# Altium PCB PCB.PcbDoc
Units mm, origin at the board's own origin, x right, y up, seen from the top; angles counter-clockwise.
Board outline 30.73 x 47.24 mm, 2 copper layers (Top Layer, Bottom Layer); 21 components, 31 nets, 97 pads, 0 vias.
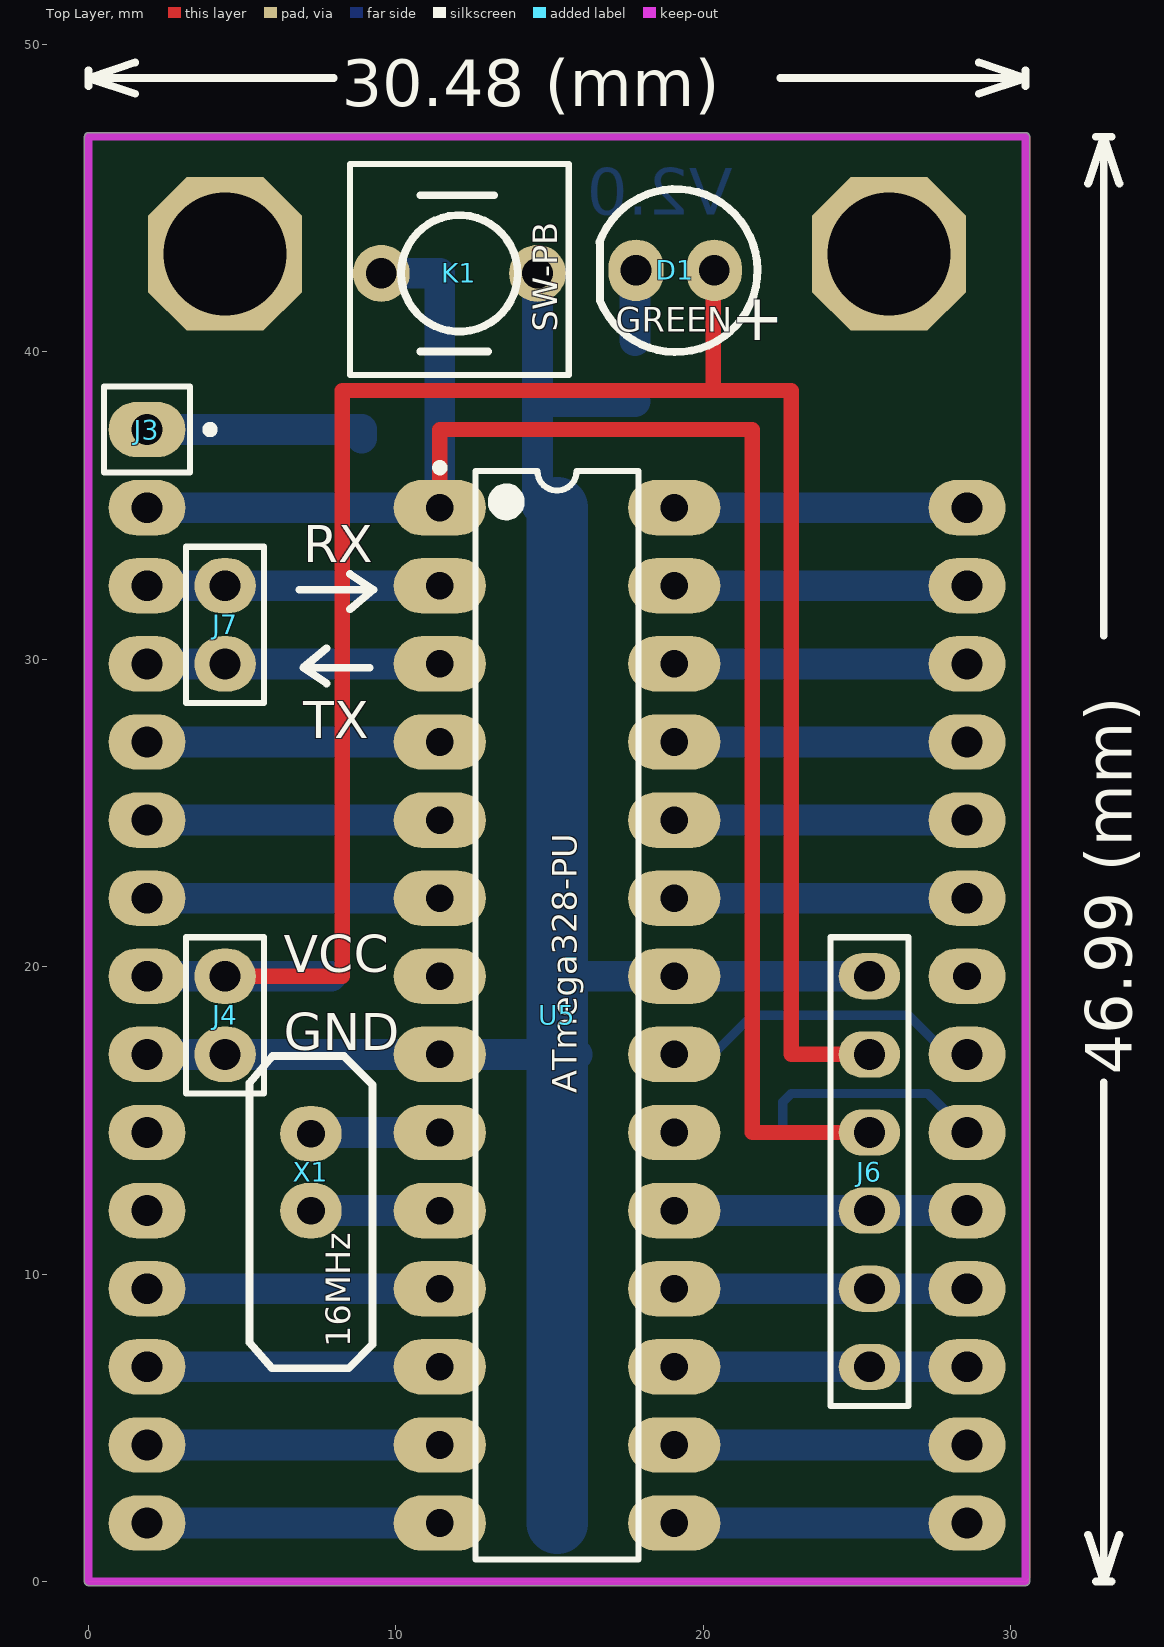
[diagram p0: Top Layer view]
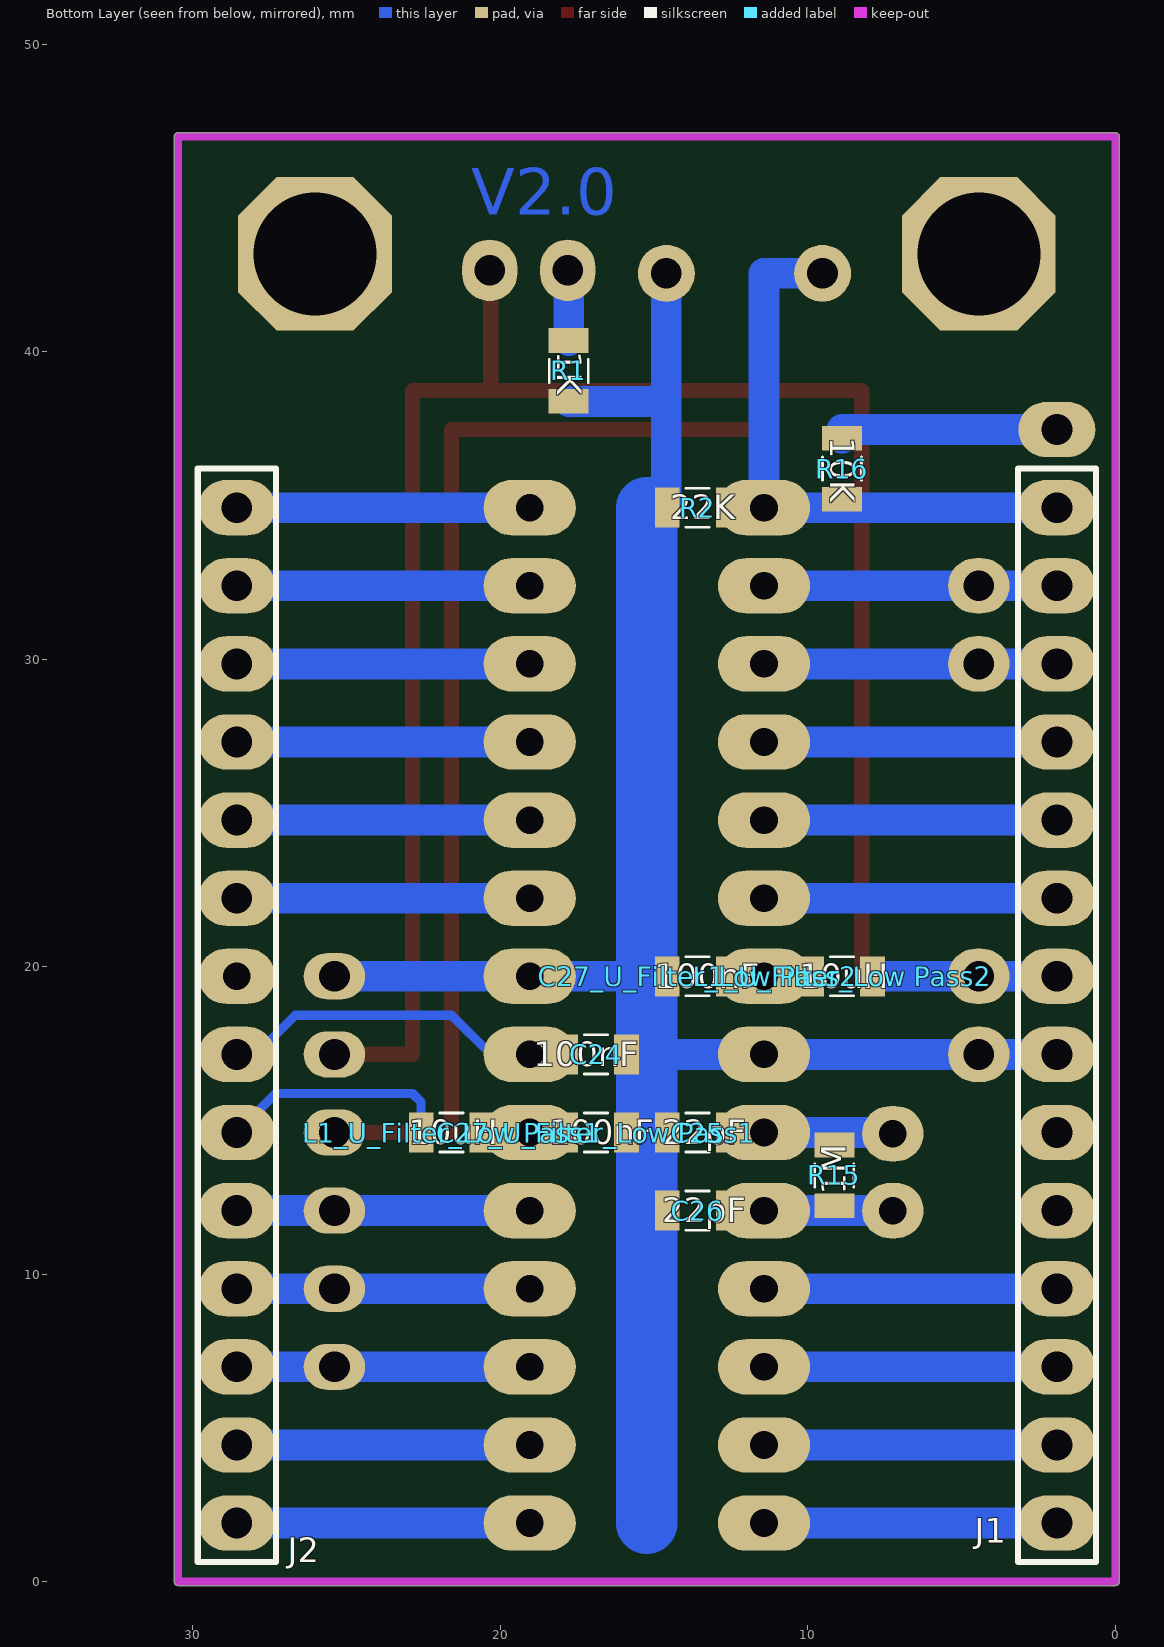
[diagram p1: Bottom Layer view, seen from below]
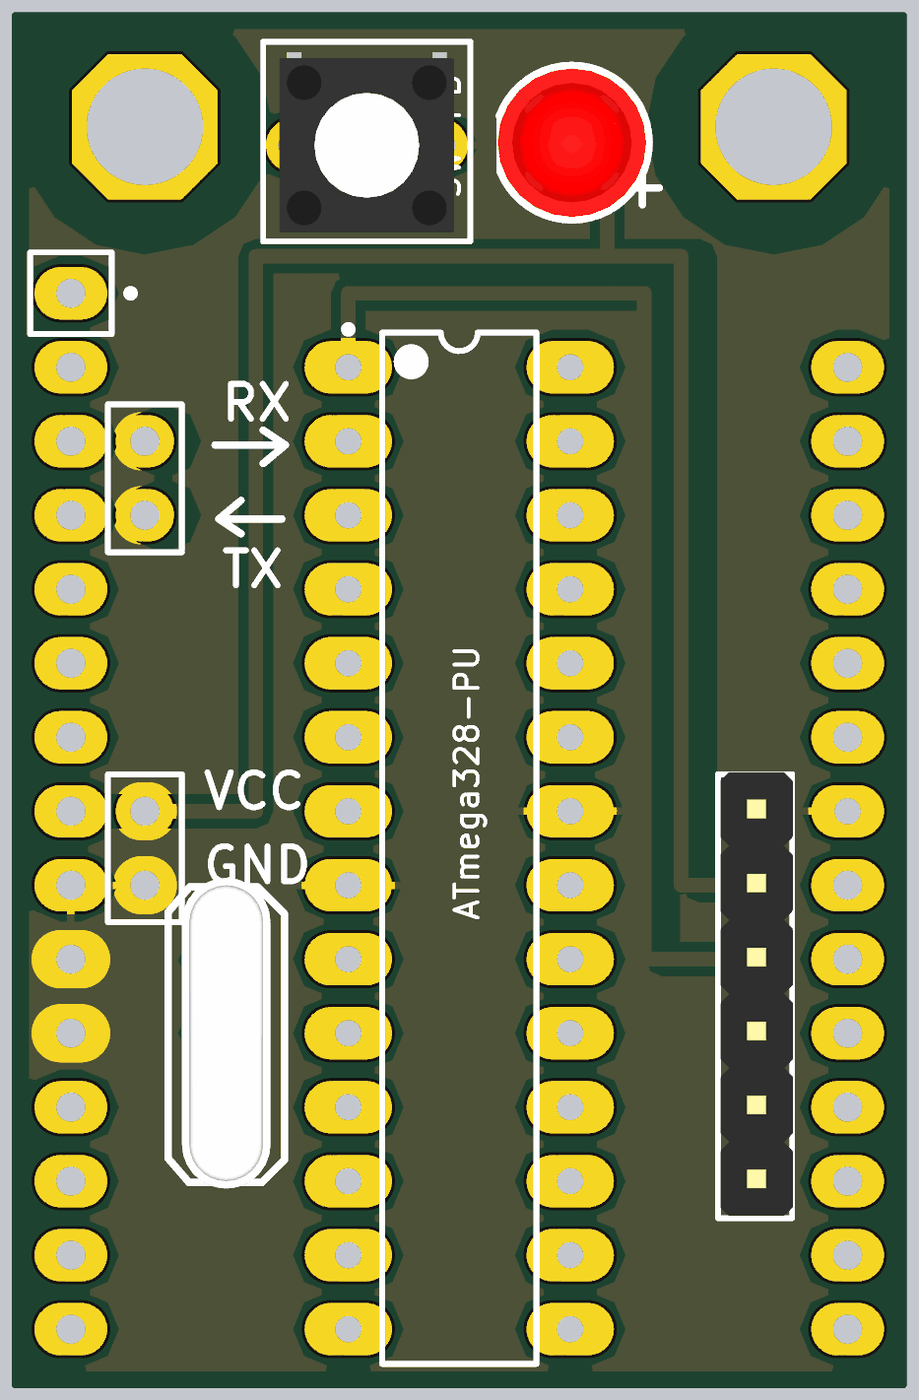
[diagram p2: 3D render of the assembled board from above, using the file's embedded part models]

## Layer stack, top to bottom
Top Solder: solder mask 0.0102, Solder Resist, Dk 3.5
Top Layer: signal copper 0.0356
Dielectric 1: dielectric 0.32, FR-4, Dk 4.8
Bottom Layer: signal copper 0.0356
Bottom Solder: solder mask 0.0102, Solder Resist, Dk 3.5

## Board outline
0,-0.127 cw(c0,0) -0.127,0 -0.127,46.99 cw(c0,46.99) 0,47.117 30.48,47.117 cw(c30.48,46.99) 30.607,46.99 30.607,0 cw(c30.48,0) 30.48,-0.127

## Design rules (kind name [scope] priority, off if disabled: settings)
Clearance [All] p1: gap=0.3
PolygonConnect [All] p1: connectstyle=Relief reliefconductorwidth=0.254 reliefentries=4 polygonreliefangle="90 Angle" airgapwidth=0.254
RoomDefinition "U_Power Supply" [InComponentClass('U_Power Supply')] p1: confinementstyle=ConfineIn formatcopy=TRUE lockcomponents=FALSE outline -25.4,-35.56 25.4,-35.56 25.4,-10.16 -25.4,-10.16
RoomDefinition Main [InComponentClass('Main')] p2: confinementstyle=ConfineIn formatcopy=TRUE lockcomponents=FALSE outline -25.4,-35.56 25.4,-35.56 25.4,-10.16 -25.4,-10.16
RoomDefinition U_MCU_ATmega328 [InComponentClass('U_MCU_ATmega328')] p3: confinementstyle=ConfineIn formatcopy=TRUE lockcomponents=FALSE outline 199.835,75.645 199.835,112.013 209.667,112.013 209.667,75.645
RoomDefinition U_Key_Reset [InComponentClass('U_Key_Reset')] p4: confinementstyle=ConfineIn formatcopy=TRUE lockcomponents=FALSE outline 193.321,112.114 206.021,112.114 206.021,123.544 193.321,123.544
RoomDefinition U_Interface_USART [InComponentClass('U_Interface_USART')] p5: confinementstyle=ConfineIn formatcopy=TRUE lockcomponents=FALSE outline 195.507,103.505 195.507,111.833 198.755,111.833 198.755,103.505
RoomDefinition "U_Filter_Low Pass2" [InComponentClass('U_Filter_Low Pass2')] p6: confinementstyle=ConfineIn formatcopy=TRUE lockcomponents=FALSE outline 185.066,93.699 198.401,93.699 198.401,98.779 185.066,98.779
RoomDefinition "U_Filter_Low Pass1" [InComponentClass('U_Filter_Low Pass1')] p7: confinementstyle=ConfineIn formatcopy=TRUE lockcomponents=FALSE outline 213.641,87.984 219.356,87.984 219.356,101.319 213.641,101.319
RoomDefinition U_Crystal [InComponentClass('U_Crystal')] p8: confinementstyle=ConfineIn formatcopy=TRUE lockcomponents=FALSE outline 186.336,78.459 199.671,78.459 199.671,93.064 186.336,93.064
RoomDefinition "U_Connectors_SPI Programer" [InComponentClass('U_Connectors_SPI Programer')] p9: confinementstyle=ConfineIn formatcopy=TRUE lockcomponents=FALSE outline 219.002,80.645 219.002,96.593 222.25,96.593 222.25,80.645
RoutingVias [All] p1: holewidth=0.711 width=1.27 viastyle="Through Hole" minholewidth=0.711 minwidth=1.27 maxholewidth=0.711 maxwidth=1.27
SolderMaskExpansion [All] p1: expansion=0.102
Width [All] p1: maxlimit=2 minlimit=0.3 preferedwidth=0.5
30 further rules are at their usual default settings.

## Classes and differential pairs
channel class "Filter_Low Pass": "U_Filter_Low Pass1" "U_Filter_Low Pass2"
component class U_MCU_ATmega328: C24 J1 J2 U5
component class U_Key_Reset: K1 R2 R16
component class "U_Filter_Low Pass2": "C27_U_Filter_Low Pass2" "L1_U_Filter_Low Pass2"
component class "U_Filter_Low Pass1": "C27_U_Filter_Low Pass1" "L1_U_Filter_Low Pass1"
component class U_Crystal: C25 C26 R15 X1
component class "U_Connectors_SPI Programer": J6
component class "U_Power Supply": D1 J4 R1
component class U_Interface_USART: J7
component class Main: J3

## Components (designator, comment, footprint, x,y, rotation, side; value= is the part's Value field where it differs from the comment)
C24 "100nF" 0805 16.891,17.145 r0 bottom
C25 "22pF" 0805 13.589,14.605 r0 bottom
C26 "22pF" 0805 13.589,12.065 r0 bottom
"C27_U_Filter_Low Pass1" "100nF" 0805 16.891,14.605 r0 bottom (schematic designator C27)
"C27_U_Filter_Low Pass2" "100nF" 0805 13.589,19.685 r180 bottom (schematic designator C27)
D1 "GREEN" LED-5mm_Red 19.05,42.545 r180 top
J1 "Header 14" HDR1X14 1.905,34.925 r270 bottom
J2 "14PIN" HDR1X14_2 29.845,0.635 r180 bottom
J3 "COAX-F" PIN1 1.905,37.465 r270 top
J4 "2PIN" HDR1X2 4.445,17.145 r90 top
J6 "6PIN" HDR1X6 25.4,6.985 r90 top
J7 "2PIN" HDR1X2 4.445,29.845 r90 top
K1 "SW-PB" SPST-2_2 12.065,42.545 r180 top
"L1_U_Filter_Low Pass1" "10uH" 0805 21.59,14.605 r180 bottom (schematic designator L1)
"L1_U_Filter_Low Pass2" "10uH" 0805 8.89,19.685 r0 bottom (schematic designator L1)
R1 "1K" 0805 17.78,39.37 r270 bottom
R2 "22K" 0805 13.589,34.925 r180 bottom
R15 "1M" 0805 9.144,13.208 r90 bottom
R16 "10K" 0805 8.89,36.195 r90 bottom
U5 "ATmega328-PU" 28P3 15.24,18.415 r0 top
X1 "16MHz" XTAL_2 7.239,12.065 r270 top

## Footprints (in the part's own frame and the unit in brackets; to place one, negate y for a bottom-side part, rotate by r counter-clockwise, add the part's x,y. Pads: shape width x height; smd on the part's side, far side on the other; paste and mask are expansions set on the pad)
28P3 [mm] "DIP, 28-Leads, Row Spacing 7.62mm, Pitch 2.54mm, Body 34.67x7.3mm"
  oval 3x1.8 hole 0.9: 1(-3.81,16.51) 2(-3.81,13.97) 3(-3.81,11.43) 4(-3.81,8.89) 5(-3.81,6.35) 6(-3.81,3.81) 7(-3.81,1.27) 8(-3.81,-1.27) 9(-3.81,-3.81) 10(-3.81,-6.35) 11(-3.81,-8.89) 12(-3.81,-11.43) 13(-3.81,-13.97) 14(-3.81,-16.51) 15(3.81,-16.51) 16(3.81,-13.97) 17(3.81,-11.43) 18(3.81,-8.89) 19(3.81,-6.35) 20(3.81,-3.81) 21(3.81,-1.27) 22(3.81,1.27) 23(3.81,3.81) 24(3.81,6.35) 25(3.81,8.89) 26(3.81,11.43) 27(3.81,13.97) 28(3.81,16.51)
  silkscreen extent -3.93,-17.7 2.65,17.93, body extent -3.6,-17.65 3.6,17.65, height 4.58
0805 [mm] "Chip Resistor, Body 2.0x1.3mm, IPC Medium Density"
  rect 0.8x1.3 smd: 1(-0.991,0) 2(0.991,0)
  silkscreen extent -0.38,-0.64 0.38,0.64, body extent -1.07,-0.7 1.07,0.7, height 0.65
HDR1X2 [mm]
  oval 1.8x2 hole 1: 1(0,0) 2(2.54,0)
  silkscreen extent -1.27,-1.27 3.81,1.27
HDR1X6 [mm]
  oval 1.5x2 hole 1: 1(0,0) 2(2.54,0) 3(5.08,0) 4(7.62,0) 5(10.16,0) 6(12.7,0)
  silkscreen extent -1.27,-1.27 13.97,1.27, body extent -1.19,-1.3 14.05,1.19, height 8.54
HDR1X14 [mm]
  oval 1.8x2.5 hole 1: 1(0,0) 2(2.54,0) 3(5.08,0) 4(7.62,0) 5(10.16,0) 6(12.7,0) 7(15.24,0) 8(17.78,0) 9(20.32,0) 10(22.86,0) 11(25.4,0) 12(27.94,0) 13(30.48,0) 14(33.02,0)
  silkscreen extent -1.27,-1.27 34.29,1.27
HDR1X14_2 [mm]
  oval 2.5x1.8 hole 1: 15(1.27,1.27) 16(1.27,3.81) 17(1.27,6.35) 18(1.27,8.89) 19(1.27,11.43) 20(1.27,13.97) 21(1.27,16.51) 23(1.27,21.59) 24(1.27,24.13) 25(1.27,26.67) 26(1.27,29.21) 27(1.27,31.75) 28(1.27,34.29)
  oval 2.5x1.8 hole 0.9: 22(1.27,19.05)
  silkscreen extent 0,0 2.54,35.56
LED-5mm_Red [mm]
  oval 1.8x2 hole 1: 1(-1.3,-0.1) 2(1.24,-0.1)
  silkscreen extent -2.71,-2.74 2.43,2.56, body extent -2.6,-2.64 2.48,2.46, height 9.6
PIN1 [mm]
  oval 1.8x2.5 hole 1: 1(0,0)
  silkscreen extent -1.4,-1.4 1.4,2.18
SPST-2_2 [mm]
  round 1.85 hole 1: 1(-2.54,0) 2(2.54,0)
  silkscreen extent -3.56,-3.56 3.56,3.3, body extent -3,-3.2 3,3, height 4.3
XTAL_2 [mm]
  oval 1.8x2 hole 0.9: 1(-2.5,0) 2(0,0)
  silkscreen extent -5.02,-2 5.13,2, body extent -5.33,-1.52 5.33,1.52, height 3.39

## Part data
C24 C25 C26 "C27_U_Filter_Low Pass1" "C27_U_Filter_Low Pass2": library part Cap, "Capacitor"
D1: library part LED, "Typical INFRARED GaAs LED"
J1: "Header, 14-Pin"
J2: library part "Header 14_2", "Header, 14-Pin"
J3: "Coax-F Connector"
J4 J7: library part "Header 2", "Header, 2-Pin"
J6: library part "Header 6", "Header, 6-Pin"
K1: "Switch"
"L1_U_Filter_Low Pass1" "L1_U_Filter_Low Pass2": library part Inductor, "Inductor"
R1 R2 R15 R16: library part Res1, "Resistor"
U5: "8-bit AVR Microcontroller, 32KB Flash, 1KB EEPROM, 2KB SRAM, 28-pin PDIP, Industrial Grade (-40°C to 85°C)"
X1: library part XTAL, "Crystal Oscillator"

## Free pads (board coordinates)
  oct 5x5 hole 4: ""(4.445,43.18) ""(26.035,43.18)

## Nets (pads, with @x,y where several pads share a name; then routed paths per layer and width w, separated by ;. In a path a pad name is that pad's centre, name@x,y a point inside that pad or via, vN(x,y) a via of type N, cw(c..) or ccw(c..) an arc to the next point about the centre after c; other vN are vias at no path point)
+5V: "L1_U_Filter_Low Pass2.1" D1.1 J1.7 J4.2 J6.5 | length 71.5
  Top Layer w0.5: J4.2 8.255,19.685 8.255,38.735 20.32,38.735 ; D1.1@20.32,42.615 20.32,38.735 ; J6.5 22.86,17.145 22.86,38.735 20.32,38.735
  Bottom Layer w1: J1.7 7.899,19.685
AVCC: "L1_U_Filter_Low Pass1.1" J2.20 | length 7.6
  Bottom Layer w0.3: 22.581,14.605 22.581,15.596 22.86,15.875 27.305,15.875 J2.20
NetD1_2: D1.2 R1.1 | length 2.3
  Bottom Layer w1: R1.1 17.78,42.615 D1.2
NetJ3_1: J3.1 R16.2 | length 7.3
  Bottom Layer w1: J3.1 8.89,37.465 R16.2
PIN1: J1.1 J6.4 K1.2 R2.2 R16.1 U5.1 | length 58.4
  Top Layer w0.5: U5.1 11.43,37.465 21.59,37.465 21.59,14.605 J6.4
  Bottom Layer w1: J1.1 U5.1 11.43,42.545 K1.2
PIN2: J1.2 J7.2 U5.2 | length 9.5
  Bottom Layer w1: J1.2 6.985,32.385 U5.2
PIN3: J1.3 J7.1 U5.3 | length 9.5
  Bottom Layer w1: J1.3 U5.3
PIN4: J1.4 U5.4 | length 9.5
  Bottom Layer w1: J1.4 U5.4
PIN5: J1.5 U5.5 | length 9.5
  Bottom Layer w1: J1.5 U5.5
PIN6: J1.6 U5.6 | length 9.5
  Bottom Layer w1: J1.6 U5.6
PIN7: "C27_U_Filter_Low Pass2.2" "L1_U_Filter_Low Pass2.2" U5.7
PIN8: "C27_U_Filter_Low Pass1.1" "C27_U_Filter_Low Pass2.1" C24.1 C25.2 C26.2 J1.8 J4.1 J6.6 K1.1 R1.2 R2.1 U5.8 U5.22 | length 67.6
  Bottom Layer w1: J1.8 U5.8 15.24,17.145 C24.1 ; R2.1@14.605,34.95 K1.1 ; 14.961,38.379 R1.2 ; 15.24,19.685 U5.22 J6.6
  Bottom Layer w2: 15.24,1.905 15.24,17.145 15.24,34.925
PIN9: C25.1 R15.2 U5.9 X1.1 | length 4.2
  Bottom Layer w1: X1.1@7.239,14.605 U5.9
PIN10: C26.1 R15.1 U5.10 X1.2 | length 4.2
  Bottom Layer w1: X1.2 U5.10
PIN11: J1.11 U5.11 | length 9.5
  Bottom Layer w1: J1.11 U5.11
PIN12: J1.12 U5.12 | length 9.5
  Bottom Layer w1: J1.12 U5.12
PIN13: J1.13 U5.13 | length 9.5
  Bottom Layer w1: J1.13 U5.13
PIN14: J1.14 U5.14 | length 9.5
  Bottom Layer w1: J1.14 U5.14
PIN15: J2.15 U5.15 | length 9.5
  Bottom Layer w1: U5.15 J2.15
PIN16: J2.16 U5.16 | length 9.5
  Bottom Layer w1: U5.16 J2.16
PIN17: J2.17 J6.1 U5.17 | length 9.5
  Bottom Layer w1: U5.17 J2.17
PIN18: J2.18 J6.2 U5.18 | length 9.5
  Bottom Layer w1: U5.18 J2.18
PIN19: J2.19 J6.3 U5.19 | length 9.5
  Bottom Layer w1: U5.19 J6.3 J2.19
PIN20: "C27_U_Filter_Low Pass1.2" "L1_U_Filter_Low Pass1.2" U5.20
PIN21: C24.2 J2.21 U5.21 | length 10.6
  Bottom Layer w0.3: U5.21 20.32,17.145 21.59,18.415 26.67,18.415 27.94,17.145 J2.21
PIN23: J2.23 U5.23 | length 9.5
  Bottom Layer w1: U5.23 J2.23
PIN24: J2.24 U5.24 | length 9.5
  Bottom Layer w1: U5.24 J2.24
PIN25: J2.25 U5.25 | length 9.5
  Bottom Layer w1: U5.25 J2.25
PIN26: J2.26 U5.26 | length 9.5
  Bottom Layer w1: U5.26 J2.26
PIN27: J2.27 U5.27 | length 9.5
  Bottom Layer w1: U5.27 J2.27
PIN28: J2.28 U5.28 | length 9.5
  Bottom Layer w1: U5.28 J2.28
pads on no net: J1.9 J1.10 J2.22

## Polygon pours and split planes (outlines as drawn)
PIN8 on Bottom Layer "Layer1_Bottom" (solid, remove dead copper, shelved, pour order 4): 0,46.99 30.607,46.99 30.607,0.127 30.48,0 0,0 0,46.99
PIN8 on Top Layer "Layer1_Top" (solid, remove dead copper, shelved, pour order 3): 0,46.99 30.607,46.99 30.607,0.127 30.48,0 0,0 0,46.99

## Keep-outs
Keep-Out Layer:
  lines w0.254: 0,0 30.48,0 30.48,46.99 0,46.99 0,0

## Other copper
Top Layer:
  pour cut-out: 8.509,15.875 5.969,15.875 5.969,8.255 8.509,8.255
Bottom Layer:
  pour cut-out: 19.05,36.195 11.43,36.195 11.43,0.635 19.05,0.635
  text "V2.0" at 20.955,44.45 h1.52

## Silkscreen, mask and mechanical layers (free items; w line width, h text height)
Top Overlay:
  lines w0.254: 0,48.641 0,49.149 ; 1.524,48.387 0,48.895 ; 1.524,49.403 0,48.895 ; 6.858,32.258 9.271,32.258 ; 7.747,29.21 6.985,29.718 ; 7.747,30.353 6.985,29.718 ; 7.978,48.895 0,48.895 ; 8.509,31.623 9.271,32.258 ; 8.509,32.766 9.271,32.258 ; 9.144,29.718 6.985,29.718 ; 22.502,48.895 30.48,48.895 ; 28.956,48.387 30.48,48.895 ; 28.956,49.403 30.48,48.895 ; 30.48,48.641 30.48,49.149 ; 32.512,1.524 33.02,0 ; 32.512,45.466 33.02,46.99 ; 32.766,0 33.274,0 ; 32.766,46.99 33.274,46.99 ; 33.02,16.233 33.02,0 ; 33.02,30.757 33.02,46.99 ; 33.528,1.524 33.02,0 ; 33.528,45.466 33.02,46.99
  text "30.48 (mm)" at 8.232,47.981 h1.52
  text "RX" at 6.985,33.147 h1.2
  text "TX" at 6.985,27.432 h1.2
  text "VCC" at 6.35,19.812 h1.2
  text "GND" at 6.35,17.272 h1.2
  text "46.99 (mm)" at 33.934,16.487 h1.52 r90

## Text inside footprints (layer, text, board x,y; h text height)
D1: Top Overlay "+" at 22.636,41.68 h1.52 r180